# Altium PCB PCB1.PcbDoc
Units mm, origin at the board's own origin, x right, y up, seen from the top; angles counter-clockwise.
Board outline 65 x 56 mm, 2 copper layers (Top Layer, Bottom Layer), stack 0.991 mm thick; 24 components, 14 nets, 102 pads, 0 vias.
Unrouted connection lines stored in the file: 48.
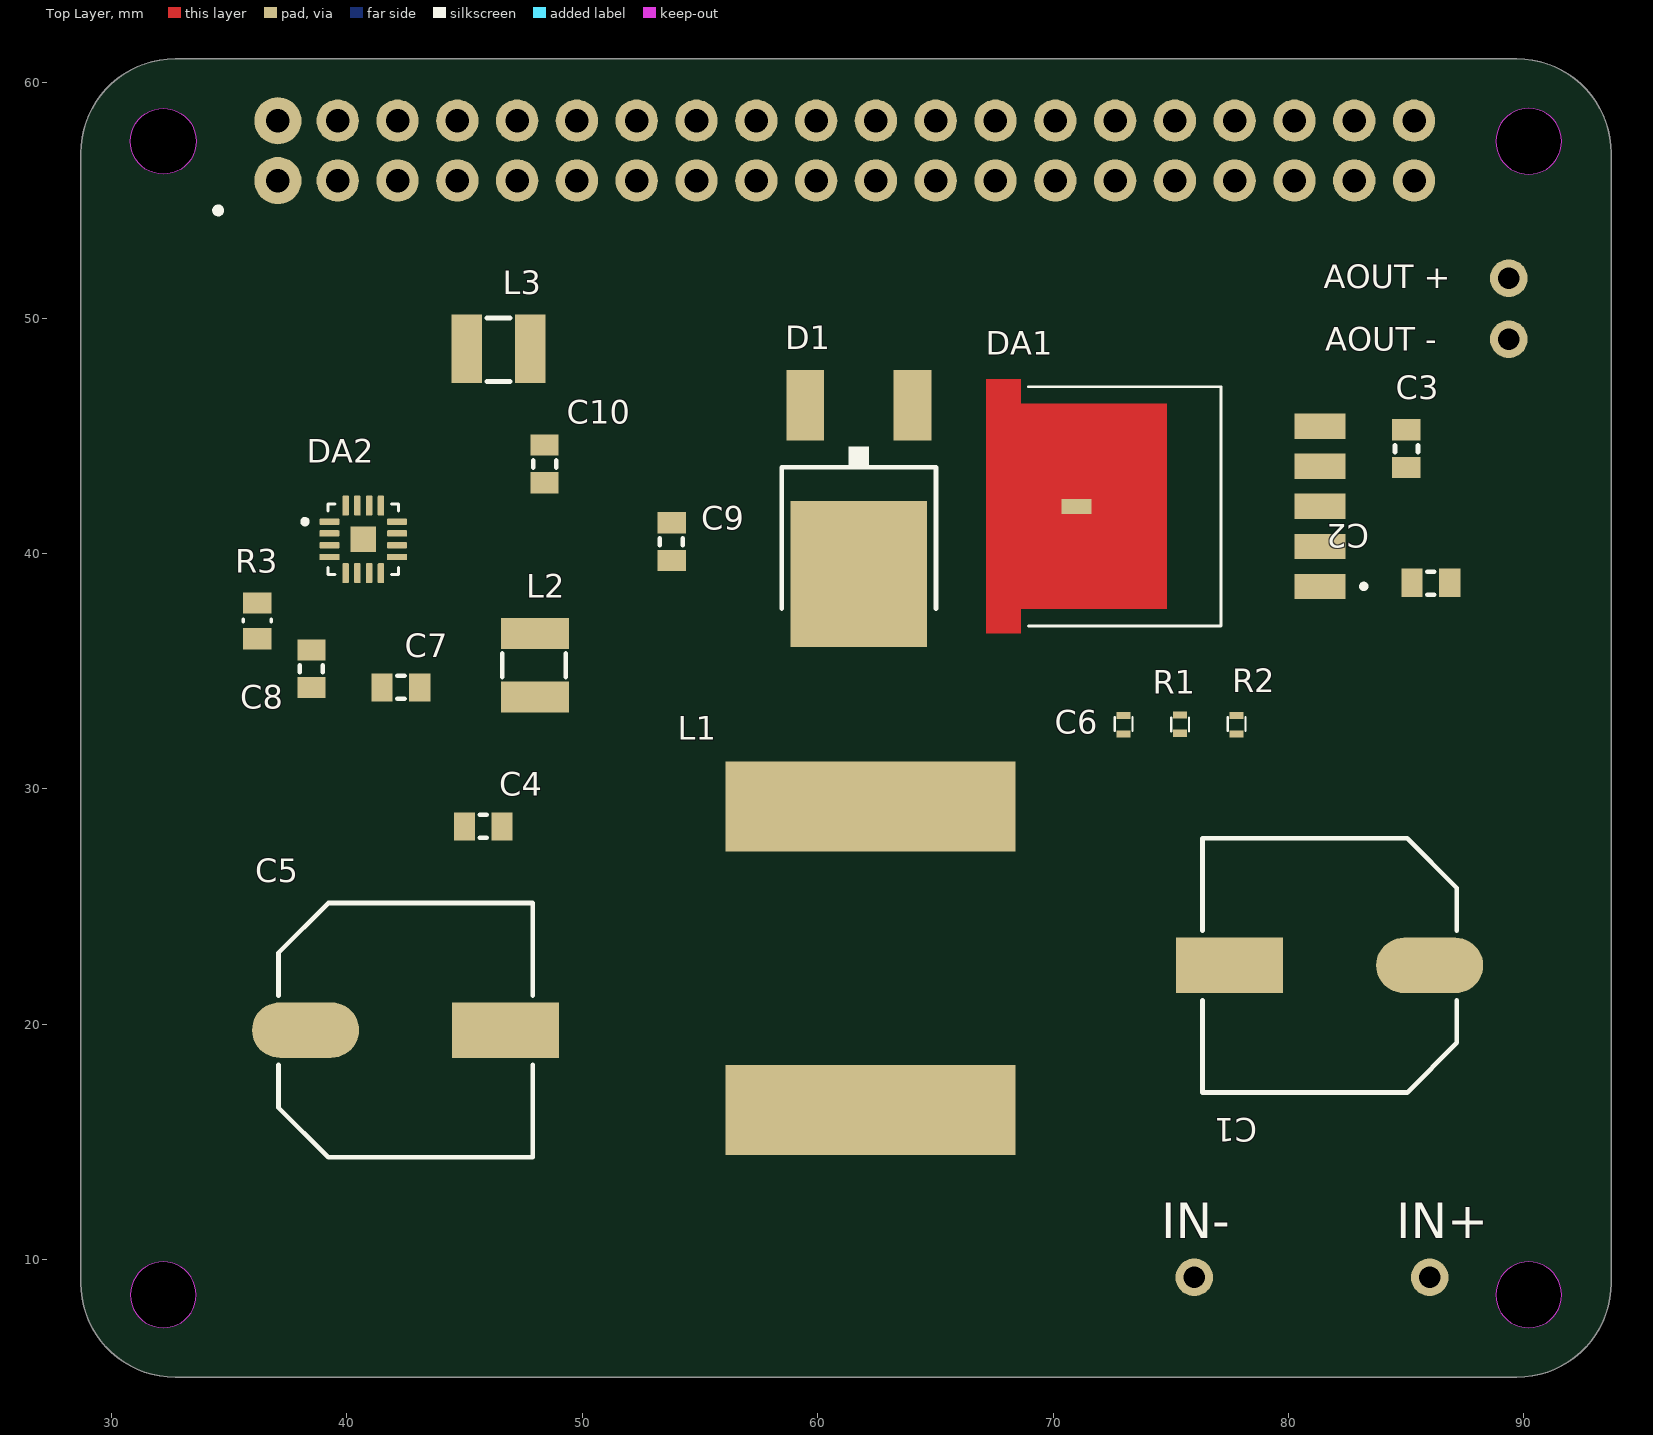
[diagram p0: Top Layer view]
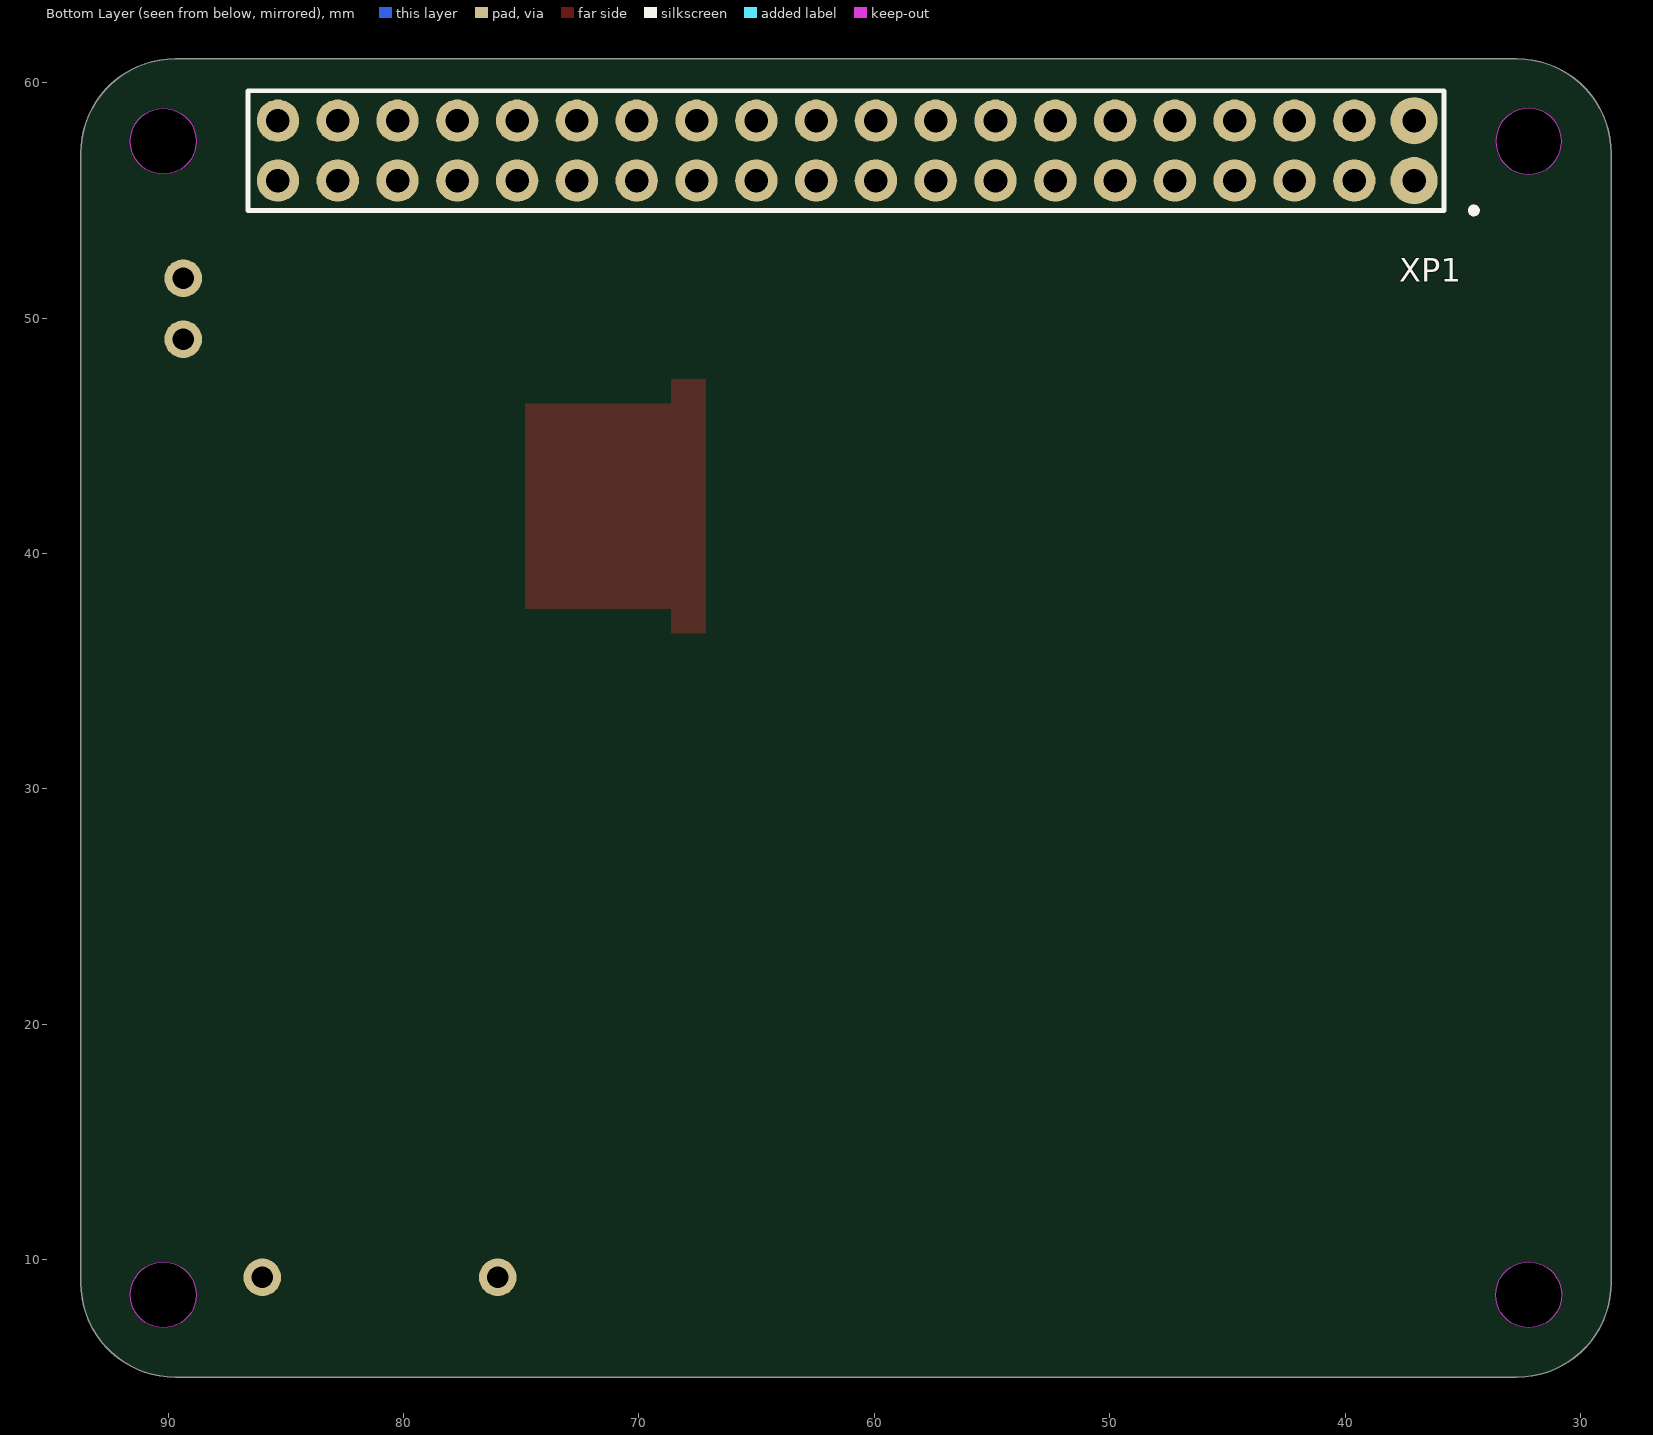
[diagram p1: Bottom Layer view, seen from below]

## Layer stack, top to bottom
Top Solder: solder mask 0.0102, Solder Resist, Dk 3.5
Top Layer: signal copper 0.0356
Dielectric 1: dielectric 0.92, FR-4, Dk 4.8
Bottom Layer: signal copper 0.0356
Bottom Solder: solder mask 0.0102, Solder Resist, Dk 3.5

## Board outline
28.706,9.006 ccw(c32.706,9.006) 32.706,5.006 89.706,5.006 ccw(c89.706,9.006) 93.706,9.006 93.706,57.006 ccw(c89.706,57.006) 89.706,61.006 32.706,61.006 ccw(c32.706,57.006) 28.706,57.006
cut-out: 30.806,8.506 ccw(c32.206,8.506) 32.206,7.106 ccw(c32.206,8.506) 33.606,8.506 ccw(c32.206,8.506) 32.206,9.906 ccw(c32.206,8.506)
cut-out: 88.806,57.506 ccw(c90.206,57.506) 90.206,56.106 ccw(c90.206,57.506) 91.606,57.506 ccw(c90.206,57.506) 90.206,58.906 ccw(c90.206,57.506)
cut-out: 88.806,8.506 ccw(c90.206,8.506) 90.206,7.106 ccw(c90.206,8.506) 91.606,8.506 ccw(c90.206,8.506) 90.206,9.906 ccw(c90.206,8.506)
cut-out: 32.206,56.106 cw(c32.206,57.506) 30.806,57.506 cw(c32.206,57.506) 32.206,58.906 cw(c32.206,57.506) 33.606,57.506 cw(c32.206,57.506)

## Design rules (kind name [scope] priority, off if disabled: settings)
Clearance [All] p1: gap=0.2 ignorepadtopadclearanceinfootprint=TRUE except(0: Arc-Hole Track-Hole SMDPad-Hole THPad-Hole Via-Hole Fill-Hole Poly-Hole Region-Hole Text-Hole)
PolygonConnect [All] p1: connectstyle=Relief reliefconductorwidth=0.254 reliefentries=4 polygonreliefangle="90 Angle" airgapwidth=0.254
RoutingVias [All] p1: holewidth=0.4 width=0.8 viastyle="Through Hole" minholewidth=0.4 minwidth=0.8 maxholewidth=0.8 maxwidth=1.2
SolderMaskExpansion [All] p1: expansion=0.102 istentingtop=FALSE
SupplyNets "Schematic Supply Nets_2" [InNet('+5В')] p1: voltage=0.000
SupplyNets "Schematic Supply Nets_1" [InNet('GND')] p2: voltage=0.000
SupplyNets "Schematic Supply Nets" [InNet('Vbat')] p3: voltage=0.000
Width [All] p1: maxlimit=2 minlimit=0.25 preferedwidth=0.25 minimp=50.000000 maximp=50.000000 favimp=50.000000
30 further rules are at their usual default settings.

## Components (designator, comment, footprint, x,y, rotation, side; value= is the part's Value field where it differs from the comment)
"AOUT +" "Отпайка" "Отпайка 0,8" 89.36,49.1 r90 top
"AOUT -" "Отпайка" "Отпайка 0,8" 89.36,51.69 r90 top
C1 "C Al SMD 220mcF" "ECAP 10-10" 86,22.5 r180 top
C2 "С_0.1uF" "CAP 0603 3D" 86.85,38.75 r270 top
C3 "С_0.1uF" "CAP 0603 3D" 85,45.25 r0 top
C4 "С_0.1uF" "CAP 0603 3D" 45,28.4 r90 top
C5 "C Al SMD 220mkf" "ECAP 10-10" 38.25,19.75 r0 top
C6 "C" "CAP 0402 3D" 73,32.338 r180 top
C7 "С_0.1uF" "CAP 0603 3D" 41.5,34.3 r90 top
C8 "С_0.1uF" "CAP 0603 3D" 38.5,34.3 r180 top
C9 "С_220pF" "CAP 0603 3D" 53.8,39.7 r180 top
C10 "С_220pF" "CAP 0603 3D" 48.4,44.6 r0 top
D1 "LF33CDT" DPACK 61.75,41.5 r180 top
DA1 "XL4015" CONV_XL4015 71,42 r180 top
DA2 "MAX98357AETE+T" QFN50P300X300X80-17N 40.7,40.6 r0 top
IN+ "IN+" "Отпайка 0,8" 86,9.25 r0 top
IN- "IN-" "Отпайка 0,8" 76,9.25 r0 top
L1 "KATUSHKA_SMD" KATUSHKA_SMD 62.25,16.35 r90 top
L2 "Z" Ferrit_1210 48,36.55 r0 top
L3 "Z" Ferrit_1210 45.15,48.7 r90 top
R1 "R 10K" "Res_0402 3D" 75.4,33.138 r0 top
R2 "R 3.3K" "Res_0402 3D" 77.8,32.338 r180 top
R3 "R_0603" "Res_0603 3D" 36.2,37.9 r0 top
XP1 "PBD_40" PBD40_8.5 42.156,57.11 r180 bottom

## Footprints (in the part's own frame and the unit in brackets; to place one, negate y for a bottom-side part, rotate by r counter-clockwise, add the part's x,y. Pads: shape width x height; smd on the part's side, far side on the other; paste and mask are expansions set on the pad)
"CAP 0402 3D" [mm] "Конденсатор керамический ЧИП (SMD)"
  rect 0.6x0.3 smd mask+0.1: 1(0,0) 2(0,-0.775)
  silkscreen extent -0.38,-0.7 0.38,-0.13, body extent -0.25,-0.88 0.25,0.12, height 0.5
"CAP 0603 3D" [mm] "Конденсатор керамический ЧИП (SMD)"
  rect 1.2x0.9 smd: 1(0,0) 2(0,-1.6)
  silkscreen extent -0.48,-0.95 0.5,-0.65, body extent -0.4,-1.65 0.4,-0.05, height 0.86
CONV_XL4015 [mm]
  rect 2.16x1.07 smd: 1(-10.335,3.4) 2(-10.335,1.7) 3(-10.335,0) 4(-10.335,-1.7) 5(-10.335,-3.4)
  rect 1.27x0.635 smd paste-2 mask+0: 3.1(0,0)
  Top Layer region: 3.835,-5.4 2.365,-5.4 2.365,-4.35 -3.835,-4.35 -3.835,4.35 2.365,4.35 2.365,5.4 3.835,5.4
  silkscreen extent -12.3,-5.08 2.05,5.08, body extent -11.24,-5.08 3.11,5.08, height 4.83
DPACK [mm]
  rect 1.6x3 smd: 1(-2.28,-4.8) 3(2.28,-4.8)
  rect 5.8x6.2 smd: 4(0,2.38)
  silkscreen extent -3.28,-3.02 3.28,3.84, body extent -3.25,-4.86 3.25,4.86, height 2.4
"ECAP 10-10" [mm] "Конденсатор электролит ЧИП (SMD)"
  rect 4.55x2.35 smd: 1(8.5,0)
  oval 4.55x2.35 smd: 2(0,0)
  silkscreen extent -1.15,-5.4 9.65,5.4, body extent -1.62,-5.15 10.13,5.15, height 10.2
Ferrit_1210 [mm] "Феррит ЧИП (SMD)"
  rect 2.9x1.3 smd: 1(0,0.05) 2(0,-2.65)
  silkscreen extent -1.4,-1.8 1.3,-0.8, body extent -1.25,-2.95 1.25,0.25, height 1.4
KATUSHKA_SMD [mm] "IHLP6767GZER470M11, ЧИП-индуктивность экранированная 47мкГн ±20% 8,7A 42,7мОм 6767 лента на катушке"
  rect 3.825x12.32 smd: 1(0,0) 2(12.9,0)
  body extent -2.2,-8.71 14.97,8.46, height 7.29
PBD40_8.5 [mm]
  round 2 hole 1: 1(5.08,-1.27) 2(5.08,1.27)
  round 1.8 hole 1: 3(2.54,-1.27) 4(2.54,1.27) 5(0,-1.27) 6(0,1.27) 7(-2.54,-1.27) 8(-2.54,1.27) 9(-5.08,-1.27) 10(-5.08,1.27) 11(-7.62,-1.27) 12(-7.62,1.27) 13(-10.16,-1.27) 14(-10.16,1.27) 15(-12.7,-1.27) 16(-12.7,1.27) 17(-15.24,-1.27) 18(-15.24,1.27) 19(-17.78,-1.27) 20(-17.78,1.27) 21(-20.32,-1.27) 22(-20.32,1.27) 23(-22.86,-1.27) 24(-22.86,1.27) 25(-25.4,-1.27) 26(-25.4,1.27) 27(-27.94,-1.27) 28(-27.94,1.27) 29(-30.48,-1.27) 30(-30.48,1.27) 31(-33.02,-1.27) 32(-33.02,1.27) 33(-35.56,-1.27) 34(-35.56,1.27) 35(-38.1,-1.27) 36(-38.1,1.27) 37(-40.64,-1.27) 38(-40.64,1.27) 39(-43.18,-1.27) 40(-43.18,1.27)
  silkscreen extent -44.45,-2.66 7.74,2.54, body extent -44.45,-2.54 6.35,2.54, height 8.4
QFN50P300X300X80-17N [mm]
  rrect25% 0.84x0.27 smd: 1(-1.435,0.75) 2(-1.435,0.25) 3(-1.435,-0.25) 4(-1.435,-0.75) 9(1.435,-0.75) 10(1.435,-0.25) 11(1.435,0.25) 12(1.435,0.75)
  rrect25% 0.27x0.84 smd: 5(-0.75,-1.435) 6(-0.25,-1.435) 7(0.25,-1.435) 8(0.75,-1.435) 13(0.75,1.435) 14(0.25,1.435) 15(-0.25,1.435) 16(-0.75,1.435)
  rect 1.1x1.1 smd paste-0.2: 17(0,0)
  silkscreen extent -2.57,-1.5 1.5,1.5, body extent -1.5,-1.5 1.5,1.5, height 0.9
"Res_0402 3D" [mm] "Резистор ЧИП (SMD)"
  rect 0.6x0.3 smd mask+0.1: 1(0,0) 2(0,-0.775)
  silkscreen extent -0.38,-0.7 0.38,-0.13, body extent -0.25,-0.9 0.25,0.1, height 0.35
"Res_0603 3D" [mm] "Резистор ЧИП (SMD)"
  rect 1.2x0.9 smd: 1(0,0) 2(0,-1.524)
  silkscreen extent -0.6,-0.8 0.6,-0.7, body extent -0.3,-1.55 0.3,0.05, height 0.63
"Отпайка 0,8" [mm] "D=0.8mm"
  round 1.6 hole 0.9: 1(0,0)

## Part data
"AOUT +" "AOUT -": "Отпайка для проводника"
C1 C5: library part "C Al SMD", "Конденсатор ECAP"
C2 C3 C4 C7 C8: library part С_0603, "0.1мкФ"
C6: "Конденсатор керамика 0.33нФ"
C9 C10: library part С_0603
D1: "Linear Voltage Regulator IC Positive Fixed 1 Output 500mA DPAK", Package="TO-252 STMicroelectronics", Check_prices=https://www.snapeda.com/parts/LF33CDT/STMicroelectronics/view-part/?ref=eda, MF=STMicroelectronics, MP=LF33CDT, SnapEDA_Link=https://www.snapeda.com/parts/LF33CDT/STMicroelectronics/view-part/?ref=snap
DA1: "5A 180KHz 36V Buck DC to DC Converter", Package=None, Check_prices=https://www.snapeda.com/parts/XL4015/XLSEMI/view-part/?ref=eda, MF=XLSEMI, MP=XL4015, SnapEDA_Link=https://www.snapeda.com/parts/XL4015/XLSEMI/view-part/?ref=snap
DA2: "Tiny, Low-Cost, PCM Class D Amplifier with Class AB Performance", Package="TQFN-16 Maxim", Check_prices=https://www.snapeda.com/parts/MAX98357AETE+T/Analog+Devices/view-part/?ref=eda, MF="Analog Devices", MP=MAX98357AETE+T, SnapEDA_Link=https://www.snapeda.com/parts/MAX98357AETE+T/Analog+Devices/view-part/?ref=snap
IN+ IN-: library part Отпайка, "Отпайка для проводника"
L2 L3: "Феррит"
R1 R2: library part R, "Резисторы плёночные (SMD; МЛТ; С2-33Н; MP9xxx)"

## Nets (pads, with @x,y where several pads share a name; then routed paths per layer and width w, separated by ;. In a path a pad name is that pad's centre, name@x,y a point inside that pad or via, vN(x,y) a via of type N, cw(c..) or ccw(c..) an arc to the next point about the centre after c; other vN are vias at no path point)
+5В: C4.1 C5.2 C6.1 C7.1 C8.1 DA2.7 DA2.8 L1.2 R1.2 R3.2 XP1.2
GND: C1.1 C2.2 C4.2 C5.1 C7.2 C8.2 C9.2 C10.2 D1.1 D1.3 DA1.1 DA2.3 DA2.11 DA2.15 DA2.17 IN-.1 R2.1 XP1.6
"NetAOUT +_1": "AOUT +.1" C10.1 L3.2
"NetAOUT -_1": "AOUT -.1" C9.1 L2.2
NetC3_2: C3.2 DA1.4
NetC6_2: C6.2 DA1.2 R1.1 R2.2
NetD1_4: D1.4 DA1.3 DA1.3.1 L1.1
NetDA2_1: DA2.1 XP1.40
NetDA2_4: DA2.4 R3.1
NetDA2_9: DA2.9 L3.1
NetDA2_10: DA2.10 L2.1
NetDA2_14: DA2.14 XP1.35
NetDA2_16: DA2.16 XP1.12
Vbat: C1.2 C2.1 C3.1 DA1.5 IN+.1
pads on no net: DA2.2 DA2.5 DA2.6 DA2.12 DA2.13 XP1.1 XP1.3 XP1.4 XP1.5 XP1.7 XP1.8 XP1.9 XP1.10 XP1.11 XP1.13 XP1.14 XP1.15 XP1.16 XP1.17 XP1.18 XP1.19 XP1.20 XP1.21 XP1.22 XP1.23 XP1.24 XP1.25 XP1.26 XP1.27 XP1.28 XP1.29 XP1.30 XP1.31 XP1.32 XP1.33 XP1.34 XP1.36 XP1.37 XP1.38 XP1.39

## Silkscreen, mask and mechanical layers (free items; w line width, h text height)
Mechanical 1:
  circle w0.013: c32.206,8.506 r1.4
  circle w0.013: c90.206,8.506 r1.4
  circle w0.013: c32.206,57.506 r1.4
  circle w0.013: c90.206,57.506 r1.4
  pour cut-out: 30.806,8.506 ccw(c32.206,8.506) 32.206,7.106 ccw(c32.206,8.506) 33.606,8.506 ccw(c32.206,8.506) 32.206,9.906 ccw(c32.206,8.506)
  pour cut-out: 30.806,8.506 ccw(c32.206,8.506) 32.206,7.106 ccw(c32.206,8.506) 33.606,8.506 ccw(c32.206,8.506) 32.206,9.906 ccw(c32.206,8.506)
  pour cut-out: 30.806,8.506 ccw(c32.206,8.506) 32.206,7.106 ccw(c32.206,8.506) 33.606,8.506 ccw(c32.206,8.506) 32.206,9.906 ccw(c32.206,8.506)
  pour cut-out: 32.206,56.106 cw(c32.206,57.506) 30.806,57.506 cw(c32.206,57.506) 32.206,58.906 cw(c32.206,57.506) 33.606,57.506 cw(c32.206,57.506)
  pour cut-out: 32.206,56.106 cw(c32.206,57.506) 30.806,57.506 cw(c32.206,57.506) 32.206,58.906 cw(c32.206,57.506) 33.606,57.506 cw(c32.206,57.506)
  pour cut-out: 32.206,56.106 cw(c32.206,57.506) 30.806,57.506 cw(c32.206,57.506) 32.206,58.906 cw(c32.206,57.506) 33.606,57.506 cw(c32.206,57.506)
  pour cut-out: 88.806,8.506 ccw(c90.206,8.506) 90.206,7.106 ccw(c90.206,8.506) 91.606,8.506 ccw(c90.206,8.506) 90.206,9.906 ccw(c90.206,8.506)
  lines w0.013: 28.706,9.006 ccw(c32.706,9.006) 32.706,5.006 89.706,5.006 ccw(c89.706,9.006) 93.706,9.006 93.706,57.006 ccw(c89.706,57.006) 89.706,61.006 32.706,61.006 ccw(c32.706,57.006) 28.706,57.006 28.706,9.006